# EAGLE board RS232_SelfPowered_Opto_Old2 (EAGLE 7.7.0)
RS232 Adapter using ACPL-827 Optocouplers Powered by PIC
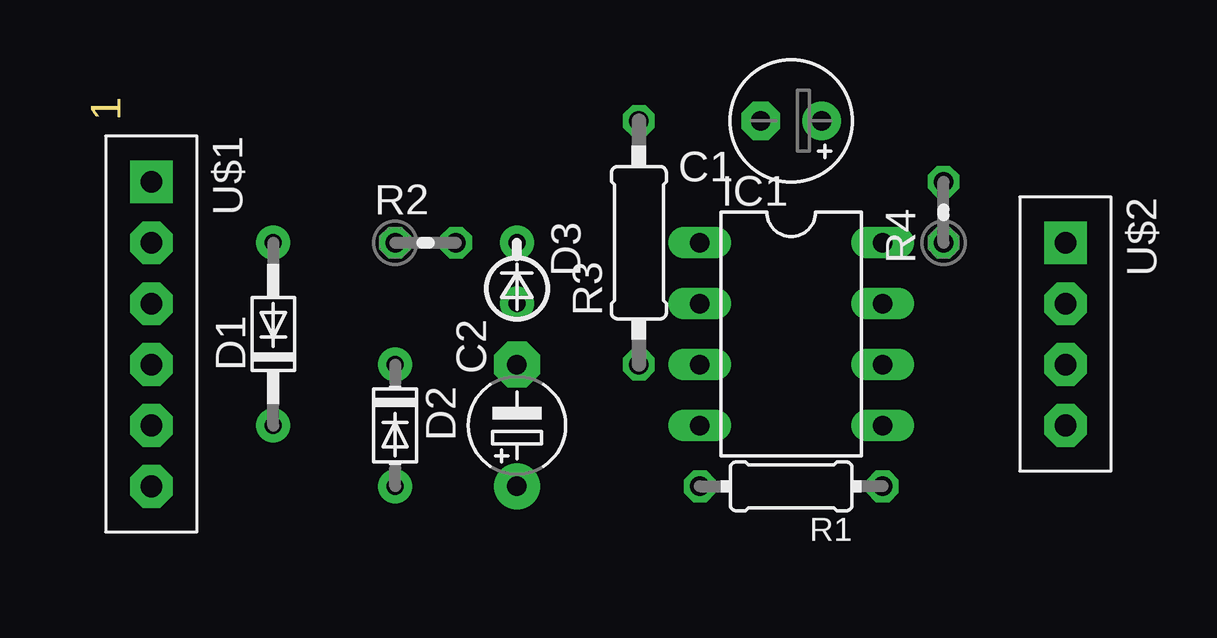
[diagram p0: board, top side]
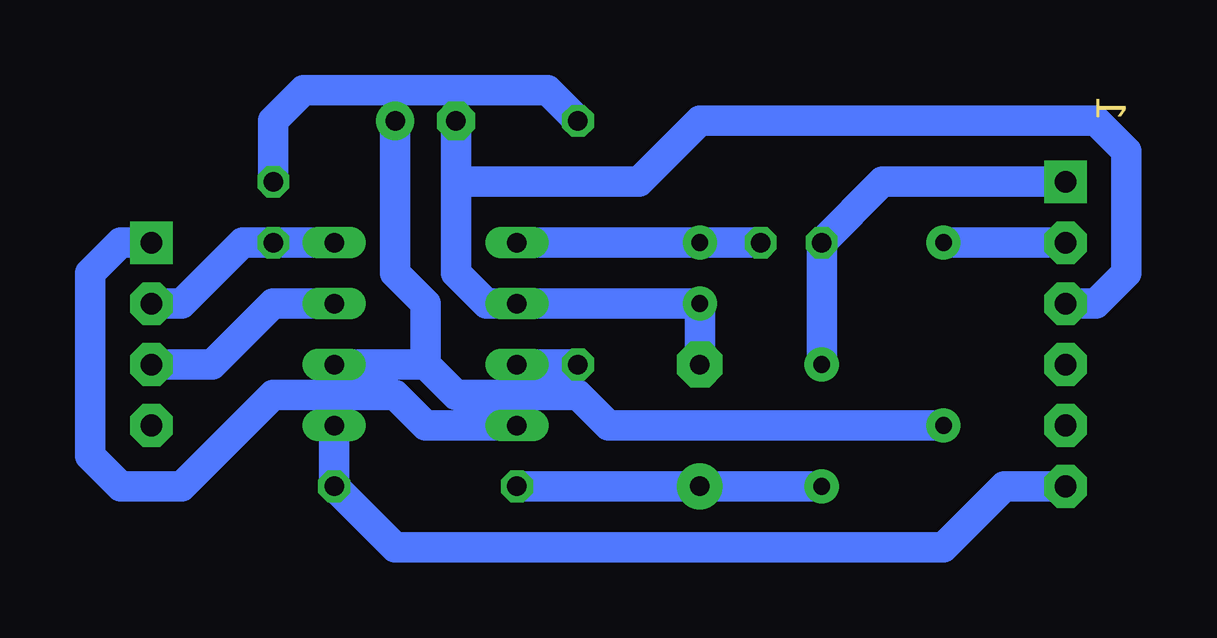
[diagram p1: board, bottom side, seen from below]

No outline drawn. Coordinates in mm, seen from the top.
Copper layers (1*16): Top 0.035mm / dielectric 1.5mm / Bottom 0.035mm
Design rules "default": minimum track width 10mil, minimum drill 24mil, track to track 8mil, track to pad 8mil, pad to pad 8mil, via to via 8mil, smd to smd 8mil, copper to edge 40mil, drill to drill 8mil, minimum pad ring 10mil, minimum via ring 8mil, stop-mask expansion 4mil, vias tented up to drill 0mil, thermal gap 10mil
Net classes: 0 default: drill 0.001 mm

## Footprints (pad centres in the part's own frame; a part is rotated, then mirrored left to right if it is on the bottom)
E2,5-5 = drill 0.813 pad 1.6: + -1.27,0 | drill 0.813 pad 1.6 octagon: - 1.27,0
E5-4 = drill 0.813 pad 1.905: + -2.54,0 | drill 0.813 pad 1.905 octagon: - 2.54,0
DO34-7 = drill 0.7 pad 1.422: A 3.81,0; C -3.81,0
DO34-5 = drill 0.7 pad 1.422: A 2.54,0; C -2.54,0
DO35-2_54 = drill 0.7 pad 1.422: A 1.27,0; C -1.27,0
DIL08 = drill 0.813 long: 1 -3.81,-3.81; 2 -1.27,-3.81; 3 1.27,-3.81; 4 3.81,-3.81; 5 3.81,3.81; 6 1.27,3.81; 7 -1.27,3.81; 8 -3.81,3.81
0204/7 = drill 0.813 octagon: 1 -3.81,0; 2 3.81,0
0204V = drill 0.813 octagon: 1 -1.27,0; 2 1.27,0
0207/10 = drill 0.813 octagon: 1 -5.08,0; 2 5.08,0
CONN-6P = drill 0.9 pad 1.778 square: 1 1.905,1.905 | drill 0.9 pad 1.778 octagon: 2 4.445,1.905; 3 6.985,1.905; 4 9.525,1.905; 5 12.065,1.905; 6 14.605,1.905
CONN-4P = drill 0.9 pad 1.778 square: 1 1.905,1.905 | drill 0.9 pad 1.778 octagon: 2 4.445,1.905; 3 6.985,1.905; 4 9.525,1.905

## Placement (x,y rotation side)
C1  47u  [E2,5-5]  26.67,-22.86 180 top
C2  47u  [E5-4]  15.24,-35.56 90 top
D1  1N914  [DO34-7]  5.08,-31.75 90 top
D2  1N914  [DO34-5]  10.16,-35.56 270 top
D3  1N914  [DO35-2_54]  15.24,-29.21 270 top
IC1  ACPL-827  [DIL08]  26.67,-31.75 270 top
R1  680Ω  [0204/7]  26.67,-38.1 180 top
R2  1kΩ  [0204V]  11.43,-27.94 0 top
R3  470Ω  [0207/10]  20.32,-27.94 90 top
R4  1kΩ  [0204V]  33.02,-26.67 90 top
U$1  COMPORT-6PIN-6P  [CONN-6P]  -1.91,-23.5 270 top
U$2  PIC-UART-4P  [CONN-4P]  36.2,-26.04 270 top

## Library data of the parts
C1 C2 R1-R4 = rcl
D1-D3 = d
IC1 = opto-c
U$1 U$2 = pinconn

## Nets
+5V: R3.2 R4.2
DGND: IC1.7 U$2.3
GND: C1.- C2.- D3.A IC1.2 U$1.3
N$1: D1.A U$1.2
N$2: C1.+ D1.C IC1.6
N$3: IC1.3 R3.1
N$4: IC1.4 U$2.1
N$5: IC1.8 R4.1 U$2.2
N$6: D3.C IC1.1 R2.2
N$9: C2.+ D2.A R1.2
N$10: IC1.5 R1.1 U$1.6
N$11: D2.C R2.1 U$1.1

## Tracks (layer width: path | path; a pad name or v marks a point on that pad's centre or on a via)
+5V
  Bottom 1.27: R3.2 21.59,-21.59 31.75,-21.59 33.02,-22.86 R4.2
DGND
  Bottom 1.27: IC1.7 33.02,-30.48 35.56,-33.02 U$2.3
GND
  Bottom 1.27: 25.4,-25.4 25.4,-29.21 24.13,-30.48 IC1.2 D3.A C2.- | U$1.3 -1.27,-30.48 -2.54,-29.21 -2.54,-24.13 -1.27,-22.86 15.24,-22.86 17.78,-25.4 25.4,-25.4 | 25.4,-25.4 C1.-
N$1
  Bottom 1.27: U$1.2 D1.A
N$2
  Bottom 1.27: C1.+ 27.94,-29.21 26.67,-30.48 26.67,-33.02 | 26.67,-33.02 IC1.6 | D1.C 19.05,-35.56 20.32,-34.29 25.4,-34.29 26.67,-33.02
N$3
  Bottom 1.27: IC1.3 R3.1
N$4
  Bottom 1.27: U$2.1 39.37,-27.94 40.64,-29.21 40.64,-36.83 39.37,-38.1 36.83,-38.1 33.02,-34.29 27.94,-34.29 26.67,-35.56 IC1.4
N$5
  Bottom 1.27: IC1.8 R4.1 34.29,-27.94 36.83,-30.48 U$2.2
N$6
  Bottom 1.27: IC1.1 D3.C R2.2
N$9
  Bottom 1.27: D2.A C2.+ R1.2
N$10
  Bottom 1.27: IC1.5 R1.1 27.94,-40.64 5.08,-40.64 2.54,-38.1 U$1.6
N$11
  Bottom 1.27: U$1.1 7.62,-25.4 R2.1 D2.C